# Altium PCB Pedal_LoopLEDS.PcbDoc
Units mm, origin at the board's own origin, x right, y up, seen from the top; angles counter-clockwise.
Board outline 186 x 15 mm, 2 copper layers (Top Layer, Bottom Layer), stack 1.071 mm thick; 74 components, 66 nets, 226 pads, 11 vias.
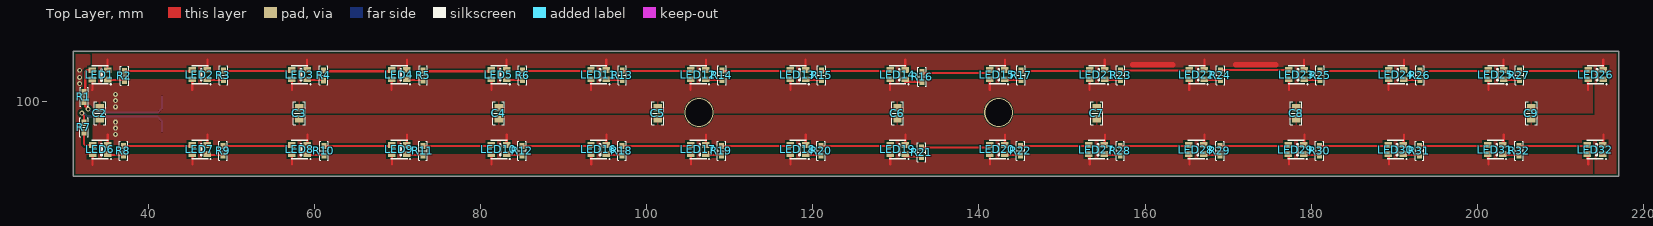
[diagram p0: Top Layer view]
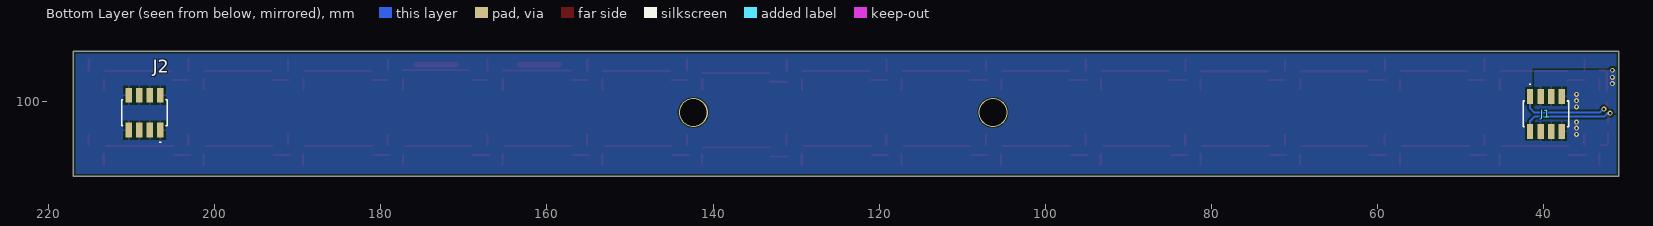
[diagram p1: Bottom Layer view, seen from below]

## Layer stack, top to bottom
Top Solder: solder mask 0.0102, Solder Resist, Dk 3.5
Top Layer: signal copper 0.0356
Dielectric 1: dielectric 1, FR-4, Dk 4.8
Bottom Layer: signal copper 0.0356
Bottom Solder: solder mask 0.0102, Solder Resist, Dk 3.5

## Board outline
31,91 31,106 217,106 217,91

## Design rules (kind name [scope] priority, off if disabled: settings)
BoardOutlineClearance [All] p1: gap=0.254 ignorepadtopadclearanceinfootprint=FALSE except(0: Arc-SplitContinuation Track-SplitContinuation SMDPad-SplitContinuation THPad-SplitContinuation Via-SplitContinuation Fill-SplitContinuation Poly-SplitContinuation Region-SplitContinuation Text-SplitContinuation)
Clearance [All] p1: gap=0.254 ignorepadtopadclearanceinfootprint=TRUE except(0.203: Arc-Arc Arc-Track Arc-SMDPad Track-Track Track-SMDPad)
HoleSize [All] p1: absolutevalues=TRUE maxlimit=4 minlimit=0.025 maxpercent=80.000 minpercent=20.000
MinimumSolderMaskSliver [All] p1: minsoldermaskwidth=0.102
PolygonConnect PolygonConnect_11 [All vs InNet('+5V')] p1: thpad.connectstyle=Relief thpad.reliefconductorwidth=0.254 thpad.reliefentries=4 thpad.polygonreliefangle="90 Angle" thpad.airgapwidth=0.254 smdpad.connectstyle=Relief smdpad.reliefconductorwidth=0.254 smdpad.reliefentries=4 smdpad.polygonreliefangle="90 Angle" smdpad.airgapwidth=0.254 via.connectstyle=Direct via.reliefconductorwidth=0.254 via.reliefentries=4 via.polygonreliefangle="90 Angle" via.airgapwidth=0.254
PolygonConnect PolygonConnect_10 [All vs InNet('+3V3_CODEC')] p2: thpad.connectstyle=Relief thpad.reliefconductorwidth=0.254 thpad.reliefentries=4 thpad.polygonreliefangle="90 Angle" thpad.airgapwidth=0.254 smdpad.connectstyle=Relief smdpad.reliefconductorwidth=0.254 smdpad.reliefentries=4 smdpad.polygonreliefangle="90 Angle" smdpad.airgapwidth=0.254 via.connectstyle=Direct via.reliefconductorwidth=0.254 via.reliefentries=4 via.polygonreliefangle="90 Angle" via.airgapwidth=0.254
PolygonConnect PolygonConnect_9 [All vs InNet('GND_A')] p3: thpad.connectstyle=Relief thpad.reliefconductorwidth=0.254 thpad.reliefentries=4 thpad.polygonreliefangle="90 Angle" thpad.airgapwidth=0.254 smdpad.connectstyle=Relief smdpad.reliefconductorwidth=0.254 smdpad.reliefentries=4 smdpad.polygonreliefangle="90 Angle" smdpad.airgapwidth=0.254 via.connectstyle=Direct via.reliefconductorwidth=0.254 via.reliefentries=4 via.polygonreliefangle="90 Angle" via.airgapwidth=0.254
PolygonConnect PolygonConnect_8 [All vs InNet('GND')] p4: thpad.connectstyle=Relief thpad.reliefconductorwidth=0.254 thpad.reliefentries=4 thpad.polygonreliefangle="90 Angle" thpad.airgapwidth=0.254 smdpad.connectstyle=Relief smdpad.reliefconductorwidth=0.254 smdpad.reliefentries=4 smdpad.polygonreliefangle="90 Angle" smdpad.airgapwidth=0.254 via.connectstyle=Direct via.reliefconductorwidth=0.254 via.reliefentries=4 via.polygonreliefangle="90 Angle" via.airgapwidth=0.254
PolygonConnect PolygonConnect_7 [All vs InNet('+MCU')] p5: thpad.connectstyle=Relief thpad.reliefconductorwidth=0.254 thpad.reliefentries=4 thpad.polygonreliefangle="90 Angle" thpad.airgapwidth=0.254 smdpad.connectstyle=Relief smdpad.reliefconductorwidth=0.254 smdpad.reliefentries=4 smdpad.polygonreliefangle="90 Angle" smdpad.airgapwidth=0.254 via.connectstyle=Direct via.reliefconductorwidth=0.254 via.reliefentries=4 via.polygonreliefangle="90 Angle" via.airgapwidth=0.254
PolygonConnect PolygonConnect_6 [All vs InNet('+5V')] p6: thpad.connectstyle=Relief thpad.reliefconductorwidth=0.254 thpad.reliefentries=4 thpad.polygonreliefangle="90 Angle" thpad.airgapwidth=0.254 smdpad.connectstyle=Relief smdpad.reliefconductorwidth=0.254 smdpad.reliefentries=4 smdpad.polygonreliefangle="90 Angle" smdpad.airgapwidth=0.254 via.connectstyle=Direct via.reliefconductorwidth=0.254 via.reliefentries=4 via.polygonreliefangle="90 Angle" via.airgapwidth=0.254
PolygonConnect PolygonConnect_5 [All vs IsNamedPolygon('+5V_L01_P002')] p7: thpad.connectstyle=Relief thpad.reliefconductorwidth=0.254 thpad.reliefentries=4 thpad.polygonreliefangle="90 Angle" thpad.airgapwidth=0.254 smdpad.connectstyle=Direct smdpad.reliefconductorwidth=0.254 smdpad.reliefentries=4 smdpad.polygonreliefangle="90 Angle" smdpad.airgapwidth=0.254 via.connectstyle=Direct via.reliefconductorwidth=0.254 via.reliefentries=4 via.polygonreliefangle="90 Angle" via.airgapwidth=0.254
PolygonConnect PolygonConnect_4 [All vs IsNamedPolygon('V_USB_L01_P001')] p8: thpad.connectstyle=Relief thpad.reliefconductorwidth=0.254 thpad.reliefentries=4 thpad.polygonreliefangle="90 Angle" thpad.airgapwidth=0.254 smdpad.connectstyle=Direct smdpad.reliefconductorwidth=0.254 smdpad.reliefentries=4 smdpad.polygonreliefangle="90 Angle" smdpad.airgapwidth=0.254 via.connectstyle=Direct via.reliefconductorwidth=0.254 via.reliefentries=4 via.polygonreliefangle="90 Angle" via.airgapwidth=0.254
PolygonConnect PolygonConnect_3 [All vs IsNamedPolygon('NETD1_1_L01_P003')] p9: thpad.connectstyle=Relief thpad.reliefconductorwidth=0.254 thpad.reliefentries=4 thpad.polygonreliefangle="90 Angle" thpad.airgapwidth=0.254 smdpad.connectstyle=Direct smdpad.reliefconductorwidth=0.254 smdpad.reliefentries=4 smdpad.polygonreliefangle="90 Angle" smdpad.airgapwidth=0.254 via.connectstyle=Direct via.reliefconductorwidth=0.254 via.reliefentries=4 via.polygonreliefangle="90 Angle" via.airgapwidth=0.254
PolygonConnect PolygonConnect_2 [All vs IsNamedPolygon('GND_L01_P005')] p10: thpad.connectstyle=Relief thpad.reliefconductorwidth=0.254 thpad.reliefentries=4 thpad.polygonreliefangle="90 Angle" thpad.airgapwidth=0.254 smdpad.connectstyle=Direct smdpad.reliefconductorwidth=0.254 smdpad.reliefentries=4 smdpad.polygonreliefangle="90 Angle" smdpad.airgapwidth=0.254 via.connectstyle=Direct via.reliefconductorwidth=0.254 via.reliefentries=4 via.polygonreliefangle="90 Angle" via.airgapwidth=0.254
PolygonConnect PolygonConnect_1 [All vs IsNamedPolygon('6V6_L01_P001')] p11: thpad.connectstyle=Relief thpad.reliefconductorwidth=0.254 thpad.reliefentries=4 thpad.polygonreliefangle="90 Angle" thpad.airgapwidth=0.254 smdpad.connectstyle=Direct smdpad.reliefconductorwidth=0.254 smdpad.reliefentries=4 smdpad.polygonreliefangle="90 Angle" smdpad.airgapwidth=0.254 via.connectstyle=Direct via.reliefconductorwidth=0.254 via.reliefentries=4 via.polygonreliefangle="90 Angle" via.airgapwidth=0.254
PolygonConnect [All] p12: connectstyle=Relief reliefconductorwidth=0.254 reliefentries=4 polygonreliefangle="90 Angle" airgapwidth=0.254
RoutingVias [All] p1: holewidth=0.3 width=0.6 viastyle="Through Hole" minholewidth=0.3 minwidth=0.6 maxholewidth=0.3 maxwidth=0.6
SolderMaskExpansion [All] p1: expansion=0.051 istentingtop=FALSE
Width [All] p1: maxlimit=1.27 minlimit=0.203 preferedwidth=0.203
28 further rules are at their usual default settings.

## Components (designator, comment, footprint, x,y, rotation, side; value= is the part's Value field where it differs from the comment)
C2 "0.1 µF" "CAP 0603_1608" 34.188,98.552 r90 top
C3 "0.1 µF" "CAP 0603_1608" 58.188,98.552 r90 top
C4 "0.1 µF" "CAP 0603_1608" 82.188,98.552 r90 top
C5 "0.1 µF" "CAP 0603_1608" 101.346,98.552 r90 top
C6 "0.1 µF" "CAP 0603_1608" 130.188,98.552 r90 top
C7 "0.1 µF" "CAP 0603_1608" 154.178,98.552 r90 top
C8 "0.1 µF" "CAP 0603_1608" 178.188,98.552 r90 top
C9 "0.1 µF" "CAP 0603_1608" 206.502,98.552 r90 top
J1 "LPPB042NFSS-RC" LPPB042NFSSRC 39.751,98.484 r180 bottom
J2 "LPPB042NFSS-RC" LPPB042NFSSRC 208.451,98.62 r0 bottom
LED1 "WS2812B" WS2812B_2.2x2mm 34.165,103.138 r180 top
LED2 "WS2812B" WS2812B_2.2x2mm 46.188,103.149 r180 top
LED3 "WS2812B" WS2812B_2.2x2mm 58.188,103.149 r180 top
LED4 "WS2812B" WS2812B_2.2x2mm 70.188,103.149 r180 top
LED5 "WS2812B" WS2812B_2.2x2mm 82.188,103.149 r180 top
LED6 "WS2812B" WS2812B_2.2x2mm 34.188,94.149 r180 top
LED7 "WS2812B" WS2812B_2.2x2mm 46.188,94.149 r180 top
LED8 "WS2812B" WS2812B_2.2x2mm 58.188,94.149 r180 top
LED9 "WS2812B" WS2812B_2.2x2mm 70.188,94.149 r180 top
LED10 "WS2812B" WS2812B_2.2x2mm 82.188,94.149 r180 top
LED11 "WS2812B" WS2812B_2.2x2mm 94.188,103.149 r180 top
LED12 "WS2812B" WS2812B_2.2x2mm 106.188,103.149 r180 top
LED13 "WS2812B" WS2812B_2.2x2mm 118.188,103.149 r180 top
LED14 "WS2812B" WS2812B_2.2x2mm 130.188,103.149 r180 top
LED15 "WS2812B" WS2812B_2.2x2mm 142.188,103.149 r180 top
LED16 "WS2812B" WS2812B_2.2x2mm 94.188,94.149 r180 top
LED17 "WS2812B" WS2812B_2.2x2mm 106.188,94.149 r180 top
LED18 "WS2812B" WS2812B_2.2x2mm 118.188,94.149 r180 top
LED19 "WS2812B" WS2812B_2.2x2mm 130.188,94.149 r180 top
LED20 "WS2812B" WS2812B_2.2x2mm 142.188,94.149 r180 top
LED21 "WS2812B" WS2812B_2.2x2mm 154.203,103.153 r180 top
LED22 "WS2812B" WS2812B_2.2x2mm 166.203,103.153 r180 top
LED23 "WS2812B" WS2812B_2.2x2mm 178.203,103.153 r180 top
LED24 "WS2812B" WS2812B_2.2x2mm 190.203,103.153 r180 top
LED25 "WS2812B" WS2812B_2.2x2mm 202.203,103.153 r180 top
LED26 "WS2812B" WS2812B_2.2x2mm 214.203,103.153 r180 top
LED27 "WS2812B" WS2812B_2.2x2mm 154.132,94.141 r180 top
LED28 "WS2812B" WS2812B_2.2x2mm 166.132,94.141 r180 top
LED29 "WS2812B" WS2812B_2.2x2mm 178.132,94.141 r180 top
LED30 "WS2812B" WS2812B_2.2x2mm 190.132,94.141 r180 top
LED31 "WS2812B" WS2812B_2.2x2mm 202.132,94.141 r180 top
LED32 "WS2812B" WS2812B_2.2x2mm 214.132,94.141 r180 top
R1 "100 Ohms" "RES 0402_1005" 32.258,100.517 r270 top
R2 "100 Ohms" "RES 0402_1005" 37.145,103.043 r270 top
R3 "100 Ohms" "RES 0402_1005" 49.068,103.12 r270 top
R4 "100 Ohms" "RES 0402_1005" 61.111,103.111 r270 top
R5 "100 Ohms" "RES 0402_1005" 73.111,103.111 r270 top
R6 "100 Ohms" "RES 0402_1005" 85.068,103.12 r270 top
R7 "100 Ohms" "RES 0402_1005" 32.258,96.841 r90 top
R8 "100 Ohms" "RES 0402_1005" 37.013,94.05 r270 top
R9 "100 Ohms" "RES 0402_1005" 49.013,94.05 r270 top
R10 "100 Ohms" "RES 0402_1005" 61.157,94.049 r270 top
R11 "100 Ohms" "RES 0402_1005" 73.056,94.041 r270 top
R12 "100 Ohms" "RES 0402_1005" 85.013,94.05 r270 top
R13 "100 Ohms" "RES 0402_1005" 97.068,103.12 r270 top
R14 "100 Ohms" "RES 0402_1005" 109.068,103.12 r270 top
R15 "100 Ohms" "RES 0402_1005" 121.068,103.12 r270 top
R16 "100 Ohms" "RES 0402_1005" 133.153,102.923 r270 top
R17 "100 Ohms" "RES 0402_1005" 145.068,103.12 r270 top
R18 "100 Ohms" "RES 0402_1005" 97.013,94.05 r270 top
R19 "100 Ohms" "RES 0402_1005" 109.013,94.05 r270 top
R20 "100 Ohms" "RES 0402_1005" 121.013,94.05 r270 top
R21 "100 Ohms" "RES 0402_1005" 133.098,93.853 r270 top
R22 "100 Ohms" "RES 0402_1005" 145.013,94.05 r270 top
R23 "100 Ohms" "RES 0402_1005" 157.068,103.12 r270 top
R24 "100 Ohms" "RES 0402_1005" 169.068,103.12 r270 top
R25 "100 Ohms" "RES 0402_1005" 181.068,103.12 r270 top
R26 "100 Ohms" "RES 0402_1005" 193.068,103.12 r270 top
R27 "100 Ohms" "RES 0402_1005" 205.068,103.12 r270 top
R28 "100 Ohms" "RES 0402_1005" 157.013,94.05 r270 top
R29 "100 Ohms" "RES 0402_1005" 169.013,94.05 r270 top
R30 "100 Ohms" "RES 0402_1005" 181.013,94.05 r270 top
R31 "100 Ohms" "RES 0402_1005" 193.013,94.05 r270 top
R32 "100 Ohms" "RES 0402_1005" 205.013,94.05 r270 top

## Footprints (in the part's own frame and the unit in brackets; to place one, negate y for a bottom-side part, rotate by r counter-clockwise, add the part's x,y. Pads: shape width x height; smd on the part's side, far side on the other; paste and mask are expansions set on the pad)
"CAP 0603_1608" [mm] "Chip Capacitor, 2-Leads, Body 1.60x0.80mm, IPC Medium Density"
  rect 0.9x1 smd: 1(-0.675,0) 2(0.675,0)
  silkscreen extent -1.4,-0.7 1.4,0.7, body extent -0.8,-0.41 0.8,0.41, height 0.82
LPPB042NFSSRC [mm]
  rect 0.76x1.8 smd: 1(-1.905,2.1) 2(-1.905,-2.1) 3(-0.635,2.1) 4(-0.635,-2.1) 5(0.635,2.1) 6(0.635,-2.1) 7(1.905,2.1) 8(1.905,-2.1)
  silkscreen extent -2.74,-1.55 2.74,3.6, body extent -2.74,-2.92 2.74,2.92, height 4.75
"RES 0402_1005" [mm] "Chip Resistor, 2-Leads, Body 1.0x0.5mm, IPC Medium Density"
  rect 0.75x0.6 smd: 1(-0.575,0) 2(0.575,0)
  silkscreen extent -1.14,-0.51 1.14,0.51, body extent -0.5,-0.25 0.5,0.25, height 0.35
WS2812B_2.2x2mm [mm]
  rect 0.9x0.7 smd: 1(-0.947,0.507) 2(-0.947,-0.593) 3(0.883,-0.593) 4(0.883,0.507)
  silkscreen extent -1.33,-1.14 0.97,1.11, body extent -1.13,-1.03 1.07,0.97, height 0.86

## Part data
C2 C3 C4 C5 C6 C7 C8 C9: library part C0603C104K5RAC7411, "CAP CER 0.1UF 50V X7R 0603", Device Package="0603 (1608 Metric)", Manufacturer=KEMET, Operating Temperature="-55°C ~ 125°C", Supplier Part Number 1=399-C0603C104K5RAC7411CT-ND, Temperature Coefficient=X7R, Tolerance=±10%, Voltage - Rated=50V, Applications="Bypass, Decoupling", Capacitance="0.1 µF", ComponentLink1Description=Datasheet, ComponentLink1URL=https://api.kemet.com/component-edge/download/datasheet/C0603C104K5RAC7411.pdf, ComponentLink2Description="DigiKey Link", ComponentLink2URL=https://www.digikey.com/en/products/detail/kemet/C0603C104K5RAC7411/3317013, LastUpdated="2/9/2024 8:10:30 PM", Lifecycle Status=Active, Minimum Order=1, Mounting Type="Surface Mount, MLCC", Package / Case="0603 (1608 Metric)", Packaging=TapeAndReel, Part Number=C0603C104K5RAC7411, Part Status=Active, PartId=2233, Price=0.01, Series="SMD Comm X7R", Size / Dimension="0.063\" L x 0.031\" W (1.60mm x 0.80mm)", Supplier 1=DigiKey, Thickness (Max)="0.035\" (0.90mm)"
J1 J2: "Connector", Manufacturer_Name=Sullins, Datasheet Link=https://www.sullinscorp.com/drawings/88_LPPB___2NFSS-RC,_11017.pdf, Height=4.65mm, Manufacturer_Part_Number=LPPB042NFSS-RC
LED1 LED2 LED3 LED4 LED5 LED6 LED7 LED8 LED9 LED10 LED11 LED12 LED13 LED14 LED15 LED16 LED17 LED18 LED19 LED20 LED21 LED22 LED23 LED24 LED25 LED26 LED27 LED28 LED29 LED30 LED31 LED32: "Address LED"
R1 R2 R3 R4 R5 R6 R7 R8 R9 R10 R11 R12 R13 R14 R15 R16 R17 R18 R19 R20 R21 R22 R23 R24 R25 R26 R27 R28 R29 R30 R31 R32: library part CRCW0402100RFKEE, "RES SMD 100 OHM 1% 1/16W 0402", Device Package="0402 (1005 Metric)", Manufacturer="Vishay Dale", Operating Temperature="-55°C ~ 155°C", Power (Watts)="0.063W, 1/16W", Ratings=AEC-Q200, Supplier Device Package=0402, Supplier Part Number 1=541-2953-1-ND, Temperature Coefficient=±100ppm/°C, Tolerance=±1%, ComponentLink1Description=Datasheet, ComponentLink1URL=http://www.vishay.com/docs/20035/dcrcwe3.pdf, ComponentLink2Description="DigiKey Link", ComponentLink2URL=https://www.digikey.com/en/products/detail/vishay-dale/CRCW0402100RFKEE/5069886, Composition="Thick Film", Features="Automotive AEC-Q200", Height - Seated (Max)="0.016\" (0.40mm)", LastUpdated="2/9/2024 8:30:05 PM", Lifecycle Status=Active, Minimum Order=1, Number of Terminations=2, Package / Case="0402 (1005 Metric)", Packaging=CutTape, Part Number=CRCW0402100RFKEE, Part Status=Active, PartId=6830, Price=0.01, Resistance="100 Ohms", Series=CRCW, Size / Dimension="0.039\" L x 0.020\" W (1.00mm x 0.50mm)", Supplier 1=DigiKey

## Free pads (board coordinates)
  round 3.5 hole 3.2 unplated: 0(106.302,98.649) 0(142.37,98.649)

## Via types
v1: diameter 0.6, hole 0.3, Top Layer to Bottom Layer, tented both sides, 11 vias

## Nets (pads, with @x,y where several pads share a name; then routed paths per layer and width w, separated by ;. In a path a pad name is that pad's centre, name@x,y a point inside that pad or via, vN(x,y) a via of type N, cw(c..) or ccw(c..) an arc to the next point about the centre after c; other vN are vias at no path point)
+5V: C2.2 C3.2 C4.2 C5.2 C6.2 C7.2 C8.2 C9.2 J1.3 J1.5 J1.7 LED1.4 LED2.4 LED3.4 LED4.4 LED5.4 LED6.4 LED7.4 LED8.4 LED9.4 LED10.4 LED11.4 LED12.4 LED13.4 LED14.4 LED15.4 LED16.4 LED17.4 LED18.4 LED19.4 LED20.4 LED21.4 LED22.4 LED23.4 LED24.4 LED25.4 LED26.4 LED27.4 LED28.4 LED29.4 LED30.4 LED31.4 LED32.4 | length 40.9
  Top Layer w0.254: 33.274,101.346 33.282,101.354 LED1.4 ; 33.297,92.357 33.305,92.365 LED6.4 ; 45.305,101.365 LED2.4 ; 45.329,92.377 LED7.4@45.329,93.654 ; 57.305,101.365 LED3.4 ; 57.329,92.377 LED8.4@57.329,93.654 ; 69.305,101.365 LED4.4 ; 69.329,92.377 LED9.4@69.329,93.654 ; 81.305,101.365 LED5.4 ; 81.329,92.377 LED10.4@81.329,93.654 ; 93.305,101.365 LED11.4 ; 93.329,92.377 LED16.4@93.329,93.654 ; 105.305,101.365 LED12.4 ; 105.329,92.377 LED17.4@105.329,93.654 ; 117.305,101.365 LED13.4 ; 117.329,92.377 LED18.4@117.329,93.654 ; 129.305,101.365 LED14.4 ; 129.329,92.377 LED19.4@129.329,93.654 ; 141.305,101.365 LED15.4 ; 141.329,92.377 LED20.4@141.329,93.654 ; 153.32,101.369 LED21.4 ; 153.344,92.38 LED27.4@153.344,93.657 ; 165.32,101.369 LED22.4 ; 165.344,92.38 LED28.4@165.344,93.657 ; 177.32,101.369 LED23.4 ; 177.344,92.38 LED29.4@177.344,93.657 ; 189.32,101.369 LED24.4 ; 189.344,92.38 LED30.4@189.344,93.657 ; 201.32,101.369 LED25.4 ; 201.344,92.38 LED31.4@201.344,93.657 ; 213.32,101.369 LED26.4 ; 213.344,92.38 LED32.4@213.344,93.657
  other v1: 36.068,99.314 36.068,100.076 36.068,100.838 31.75,102.108 31.75,102.87 31.75,103.731
GND: C2.1 C3.1 C4.1 C5.1 C6.1 C7.1 C8.1 C9.1 J1.4 J1.6 J1.8 J2.1 J2.2 J2.3 J2.4 J2.5 J2.6 J2.7 J2.8 LED1.2 LED2.2 LED3.2 LED4.2 LED5.2 LED6.2 LED7.2 LED8.2 LED9.2 LED10.2 LED11.2 LED12.2 LED13.2 LED14.2 LED15.2 LED16.2 LED17.2 LED18.2 LED19.2 LED20.2 LED21.2 LED22.2 LED23.2 LED24.2 LED25.2 LED26.2 LED27.2 LED28.2 LED29.2 LED30.2 LED31.2 LED32.2 | length 50.6
  Top Layer w0.254: 35.104,105.016 35.112,105.008 LED1.2 ; LED6.2 35.135,96.02 ; LED2.2@47.135,103.72 47.135,104.997 ; LED7.2@47.159,94.731 47.159,96.008 ; LED3.2@59.135,103.72 59.135,104.997 ; LED8.2@59.159,94.731 59.159,96.008 ; LED4.2@71.135,103.72 71.135,104.997 ; LED9.2@71.159,94.731 71.159,96.008 ; LED5.2@83.135,103.72 83.135,104.997 ; LED10.2@83.159,94.731 83.159,96.008 ; LED11.2@95.135,103.72 95.135,104.997 ; LED16.2@95.159,94.731 95.159,96.008 ; LED12.2@107.135,103.72 107.135,104.997 ; LED17.2@107.159,94.731 107.159,96.008 ; LED13.2@119.135,103.72 119.135,104.997 ; LED18.2@119.159,94.731 119.159,96.008 ; LED14.2@131.135,103.72 131.135,104.997 ; LED19.2@131.159,94.731 131.159,96.008 ; LED15.2@143.135,103.72 143.135,104.997 ; LED20.2@143.159,94.731 143.159,96.008 ; LED21.2@155.15,103.716 155.15,104.993 ; LED27.2@155.174,94.728 155.174,96.005 ; LED22.2@167.15,103.716 167.15,104.993 ; LED28.2@167.174,94.728 167.174,96.005 ; LED23.2@179.15,103.716 179.15,104.993 ; LED29.2@179.174,94.728 179.174,96.005 ; LED24.2@191.15,103.716 191.15,104.993 ; LED30.2@191.174,94.728 191.174,96.005 ; LED25.2@203.15,103.716 203.15,104.993 ; LED31.2@203.174,94.728 203.174,96.005 ; LED26.2@215.15,103.716 215.15,104.993 ; LED32.2@215.174,94.728 215.174,96.005
  Top Layer w0.635: 158.513,104.394 163.322,104.394 ; 170.89,104.394 175.768,104.394
  other v1: 36.068,96.012 36.068,96.774 36.068,97.495
NetJ1_1: J1.1 R1.2 | length 11.8
  Top Layer w0.254: R1.2 32.424,99.776 32.424,99.402 v1(32.766,99.06)
  Bottom Layer w0.254: v1(32.766,99.06) 32.834,99.06 33.261,98.633 41.14,98.633 41.656,99.149 J1.1
NetJ1_2: J1.2 R7.2 | length 12.5
  Top Layer w0.254: v1(32.018,98.562) 32.018,98.48 32.258,98.24 R7.2
  Bottom Layer w0.254: v1(32.018,98.562) 32.084,98.496 32.367,98.496 32.687,98.176 41.103,98.176 41.656,97.623 J1.2
NetLED1_1: LED1.1 R2.2 | length 2.1
  Top Layer w0.254: LED1.1@35.048,102.545 37.068,102.545 R2.2
NetLED1_3: LED1.3 R1.1 | length 3.5
  Top Layer w0.254: R1.1 32.431,101.265 32.431,103.582 32.58,103.731 LED1.3
NetLED2_1: LED2.1 R3.2 | length 2
  Top Layer w0.254: LED2.1@47.048,102.545 R3.2
NetLED2_3: LED2.3 R2.1 | length 8.1
  Top Layer w0.254: R2.1 LED2.3@45.218,103.618
NetLED3_1: LED3.1 R4.2 | length 2
  Top Layer w0.254: LED3.1@59.092,102.536 R4.2
NetLED3_3: LED3.3 R3.1 | length 8.1
  Top Layer w0.254: R3.1@49.145,103.618 LED3.3@57.218,103.618
NetLED4_1: LED4.1 R5.2 | length 2
  Top Layer w0.254: LED4.1@71.092,102.536 R5.2
NetLED4_3: LED4.3 R4.1 | length 8.1
  Top Layer w0.254: R4.1@61.188,103.609 LED4.3@69.262,103.609
NetLED5_1: LED5.1 R6.2 | length 2
  Top Layer w0.254: LED5.1@83.048,102.545 R6.2
NetLED5_3: LED5.3 R5.1 | length 8.1
  Top Layer w0.254: R5.1@73.188,103.609 LED5.3@81.262,103.609
NetLED6_1: LED6.1 R8.2 | length 2.1
  Top Layer w0.254: LED6.1@34.916,93.552 36.936,93.552 R8.2
NetLED6_3: LED6.3 R7.1 | length 2.3
  Top Layer w0.254: R7.1 32.258,94.876 32.407,94.728 32.977,94.728 32.994,94.744 LED6.3@33.086,94.652
NetLED7_1: LED7.1 R9.2 | length 2
  Top Layer w0.254: LED7.1@46.916,93.552 R9.2@48.936,93.552
NetLED7_3: LED7.3 R8.1 | length 8.1
  Top Layer w0.254: R8.1 LED7.3@45.086,94.625
NetLED8_1: LED8.1 R10.2 | length 2
  Top Layer w0.254: LED8.1@58.96,93.543 R10.2@60.979,93.543
NetLED8_3: LED8.3 R9.1 | length 8.1
  Top Layer w0.254: R9.1 LED8.3@57.086,94.625
NetLED9_1: LED9.1 R11.2 | length 2
  Top Layer w0.254: LED9.1@70.96,93.543 R11.2@72.979,93.543
NetLED9_3: LED9.3 R10.1 | length 8.1
  Top Layer w0.254: R10.1 LED9.3@69.23,94.624
NetLED10_1: LED10.1 R12.2 | length 2
  Top Layer w0.254: LED10.1@82.916,93.552 R12.2@84.936,93.552
NetLED10_3: LED10.3 R11.1 | length 8.1
  Top Layer w0.254: R11.1 LED10.3@81.13,94.616
NetLED11_1: LED11.1 R13.2 | length 2
  Top Layer w0.254: LED11.1@95.048,102.545 R13.2
NetLED11_3: LED11.3 R6.1 | length 8.1
  Top Layer w0.254: R6.1@85.145,103.618 LED11.3@93.218,103.618
NetLED12_1: LED12.1 R14.2 | length 2
  Top Layer w0.254: LED12.1@107.048,102.545 R14.2
NetLED12_3: LED12.3 R13.1 | length 8.1
  Top Layer w0.254: R13.1@97.145,103.618 LED12.3@105.218,103.618
NetLED13_1: LED13.1 R15.2 | length 2
  Top Layer w0.254: LED13.1@119.048,102.545 R15.2
NetLED13_3: LED13.3 R14.1 | length 8.1
  Top Layer w0.254: R14.1@109.145,103.618 LED13.3@117.218,103.618
NetLED14_1: LED14.1 R16.2 | length 2
  Top Layer w0.254: LED14.1@131.133,102.348 R16.2
NetLED14_3: LED14.3 R15.1 | length 8.1
  Top Layer w0.254: R15.1@121.145,103.618 LED14.3@129.218,103.618
NetLED15_1: LED15.1 R17.2 | length 2
  Top Layer w0.254: LED15.1@143.048,102.545 R17.2
NetLED15_3: LED15.3 R16.1 | length 8.1
  Top Layer w0.254: R16.1@133.23,103.421 LED15.3@141.303,103.421
NetLED16_1: LED16.1 R18.2 | length 2
  Top Layer w0.254: LED16.1@94.916,93.552 R18.2@96.936,93.552
NetLED16_3: LED16.3 R12.1 | length 8.1
  Top Layer w0.254: R12.1 LED16.3@93.086,94.625
NetLED17_1: LED17.1 R19.2 | length 2
  Top Layer w0.254: LED17.1@106.916,93.552 R19.2@108.936,93.552
NetLED17_3: LED17.3 R18.1 | length 8.1
  Top Layer w0.254: R18.1 LED17.3@105.086,94.625
NetLED18_1: LED18.1 R20.2 | length 2
  Top Layer w0.254: LED18.1@118.916,93.552 R20.2@120.936,93.552
NetLED18_3: LED18.3 R19.1 | length 8.1
  Top Layer w0.254: R19.1 LED18.3@117.086,94.625
NetLED19_1: LED19.1 R21.2 | length 2
  Top Layer w0.254: LED19.1@131.001,93.355 R21.2@133.021,93.355
NetLED19_3: LED19.3 R20.1 | length 8.1
  Top Layer w0.254: R20.1 LED19.3@129.086,94.625
NetLED20_1: LED20.1 R22.2 | length 2
  Top Layer w0.254: LED20.1@142.916,93.552 R22.2@144.936,93.552
NetLED20_3: LED20.3 R21.1 | length 8.1
  Top Layer w0.254: R21.1 LED20.3@141.171,94.428
NetLED21_1: LED21.1 R23.2 | length 2
  Top Layer w0.254: LED21.1@155.048,102.545 R23.2
NetLED21_3: LED21.3 R17.1 | length 8.1
  Top Layer w0.254: R17.1@145.145,103.618 LED21.3@153.218,103.618
NetLED22_1: LED22.1 R24.2 | length 2
  Top Layer w0.254: LED22.1@167.048,102.545 R24.2
NetLED22_3: LED22.3 R23.1 | length 8.3
  Top Layer w0.254: R23.1 165.269,103.695 LED22.3
NetLED23_1: LED23.1 R25.2 | length 2
  Top Layer w0.254: LED23.1@179.048,102.545 R25.2
NetLED23_3: LED23.3 R24.1 | length 7.9
  Top Layer w0.254: 169.428,103.746 LED23.3
NetLED24_1: LED24.1 R26.2 | length 2
  Top Layer w0.254: LED24.1@191.048,102.545 R26.2
NetLED24_3: LED24.3 R25.1 | length 8.1
  Top Layer w0.254: R25.1@181.145,103.618 LED24.3@189.218,103.618
NetLED25_1: LED25.1 R27.2 | length 2
  Top Layer w0.254: LED25.1@203.048,102.545 R27.2
NetLED25_3: LED25.3 R26.1 | length 8.1
  Top Layer w0.254: R26.1@193.145,103.618 LED25.3@201.218,103.618
NetLED26_3: LED26.3 R27.1 | length 8.1
  Top Layer w0.254: R27.1@205.145,103.618 LED26.3@213.218,103.618
NetLED27_1: LED27.1 R28.2 | length 2
  Top Layer w0.254: LED27.1@154.916,93.552 R28.2@156.936,93.552
NetLED27_3: LED27.3 R22.1 | length 8.1
  Top Layer w0.254: R22.1 LED27.3@153.086,94.625
NetLED28_1: LED28.1 R29.2 | length 2
  Top Layer w0.254: LED28.1@166.916,93.552 R29.2@168.936,93.552
NetLED28_3: LED28.3 R28.1 | length 8.1
  Top Layer w0.254: R28.1 LED28.3@165.086,94.625
NetLED29_1: LED29.1 R30.2 | length 2
  Top Layer w0.254: LED29.1@178.916,93.552 R30.2@180.936,93.552
NetLED29_3: LED29.3 R29.1 | length 8.1
  Top Layer w0.254: R29.1 LED29.3@177.086,94.625
NetLED30_1: LED30.1 R31.2 | length 2
  Top Layer w0.254: LED30.1@190.916,93.552 R31.2@192.936,93.552
NetLED30_3: LED30.3 R30.1 | length 8.1
  Top Layer w0.254: R30.1 LED30.3@189.086,94.625
NetLED31_1: LED31.1 R32.2 | length 2
  Top Layer w0.254: LED31.1@202.916,93.552 R32.2@204.936,93.552
NetLED31_3: LED31.3 R31.1 | length 8.1
  Top Layer w0.254: R31.1 LED31.3@201.086,94.625
NetLED32_3: LED32.3 R32.1 | length 8.1
  Top Layer w0.254: R32.1 LED32.3@213.086,94.625
pads on no net: LED26.1 LED32.1

## Polygon pours and split planes (outlines as drawn)
GND on Top Layer "NONET_L02_P-001" (solid, remove dead copper, pour order 1): 33.313,98.821 33.325,98.833 213.348,98.833 213.883,98.298 215.392,98.298 215.392,94.742 33.305,94.742
+5V on Top Layer "NONET_L02_P-001" (solid, remove dead copper, pour order 0): 33.282,102.631 33.293,102.642 213.317,102.642 213.32,102.646 213.868,102.098 213.868,98.552 33.274,98.552
GND on Top Layer "NONET_L02_P-001" (solid, remove dead copper, pour order 4): 214.122,106 214.122,91.186 216.916,91.186 216.916,106
+5V on Top Layer "NONET_L02_P-001" (solid, remove dead copper, pour order 6): 33.286,105.741 33.209,105.664 30.734,105.664 30.734,91.44 30.988,91.186 31.061,91.259 33.379,91.259 33.379,91.647 34.188,92.456 33.782,92.862 33.782,105.41
GND on Top Layer "NONET_L02_P-001" (solid, remove dead copper, pour order 3): 33.29,107.81 33.301,107.821 213.325,107.821 213.328,107.825 214.376,106.777 214.376,103.731 33.282,103.731
+5V on Top Layer "NONET_L02_P-001" (solid, remove dead copper, pour order 2): 33.294,93.631 33.305,93.642 213.329,93.642 213.332,93.646 213.88,93.098 213.88,89.552 33.286,89.552
GND on Bottom Layer "NONET_L02_P-001" (solid, remove dead copper, pour order 7): 30.988,105.918 30.988,90.932 216.916,90.932 216.916,105.918
+5V on Bottom Layer "NONET_L02_P-001" (solid, remove dead copper, pour order 5): 41.148,103.731 41.148,98.806 40.894,98.552 31.242,98.552 31.242,103.731

## Silkscreen, mask and mechanical layers (free items; w line width, h text height)
Board Shape:
  the board outline again, w0.254
Dimensions:
  circle w0.013: c214.188,94.149 r0.5
  circle w0.013: c214.188,103.149 r0.5
  circle w0.013: c202.188,94.149 r0.5
  circle w0.013: c202.188,103.149 r0.5
  circle w0.013: c190.188,94.149 r0.5
  circle w0.013: c190.188,103.149 r0.5
  circle w0.013: c178.188,94.149 r0.5
  circle w0.013: c178.188,103.149 r0.5
  circle w0.013: c166.188,94.149 r0.5
  circle w0.013: c166.188,103.149 r0.5
  circle w0.013: c154.188,94.149 r0.5
  circle w0.013: c154.188,103.149 r0.5
  circle w0.013: c142.188,94.149 r0.5
  circle w0.013: c142.188,103.149 r0.5
  circle w0.013: c130.188,94.149 r0.5
  circle w0.013: c130.188,103.149 r0.5
  circle w0.013: c118.188,94.149 r0.5
  circle w0.013: c118.188,103.149 r0.5
  circle w0.013: c106.188,94.149 r0.5
  circle w0.013: c106.188,103.149 r0.5
  circle w0.013: c94.188,94.149 r0.5
  circle w0.013: c94.188,103.149 r0.5
  circle w0.013: c82.188,94.149 r0.5
  circle w0.013: c82.188,103.149 r0.5
  circle w0.013: c70.188,94.149 r0.5
  circle w0.013: c70.188,103.149 r0.5
  circle w0.013: c58.188,94.149 r0.5
  circle w0.013: c58.188,103.149 r0.5
  circle w0.013: c46.188,94.149 r0.5
  circle w0.013: c46.188,103.149 r0.5
  circle w0.013: c34.188,94.149 r0.5
  circle w0.013: c34.188,103.149 r0.5
  lines w0.254: 154.188,94.149 154.188,94.149